# Altium PCB PCB1.PcbDoc
Units mm, origin at the board's own origin, x right, y up, seen from the top; angles counter-clockwise.
Board outline 99.95 x 60.07 mm, 2 copper layers (Top Layer, Bottom Layer); 15 components, 7 nets, 40 pads, 0 vias.
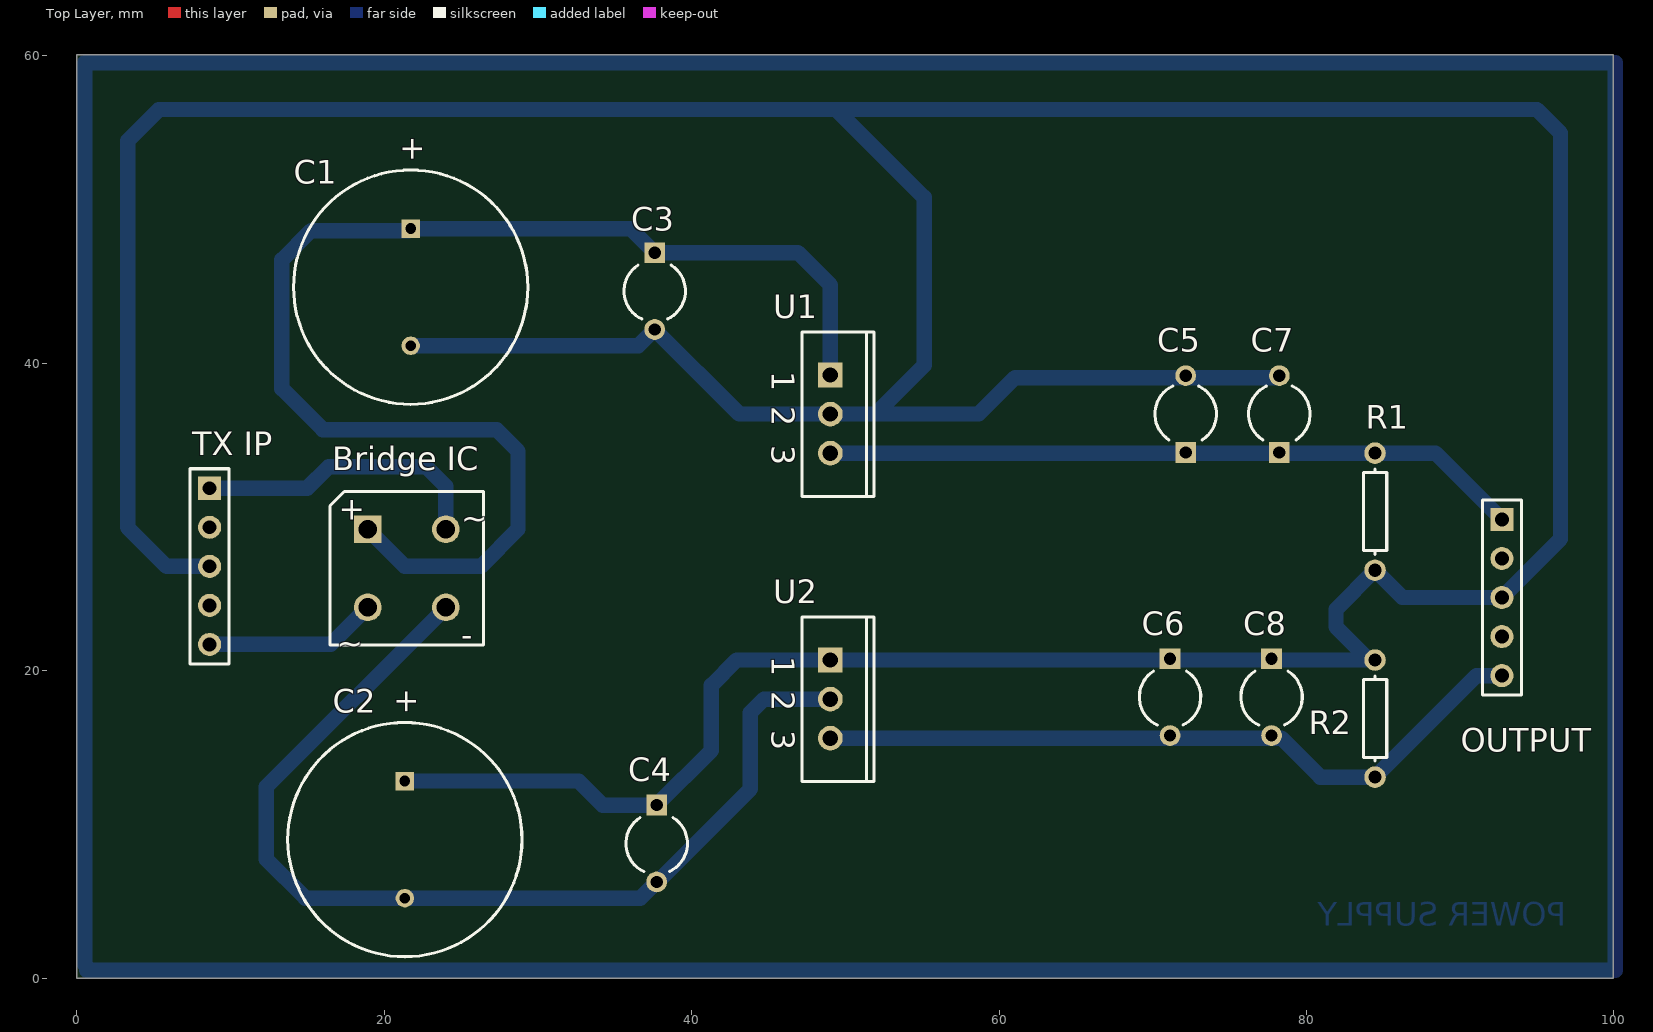
[diagram p0: Top Layer view]
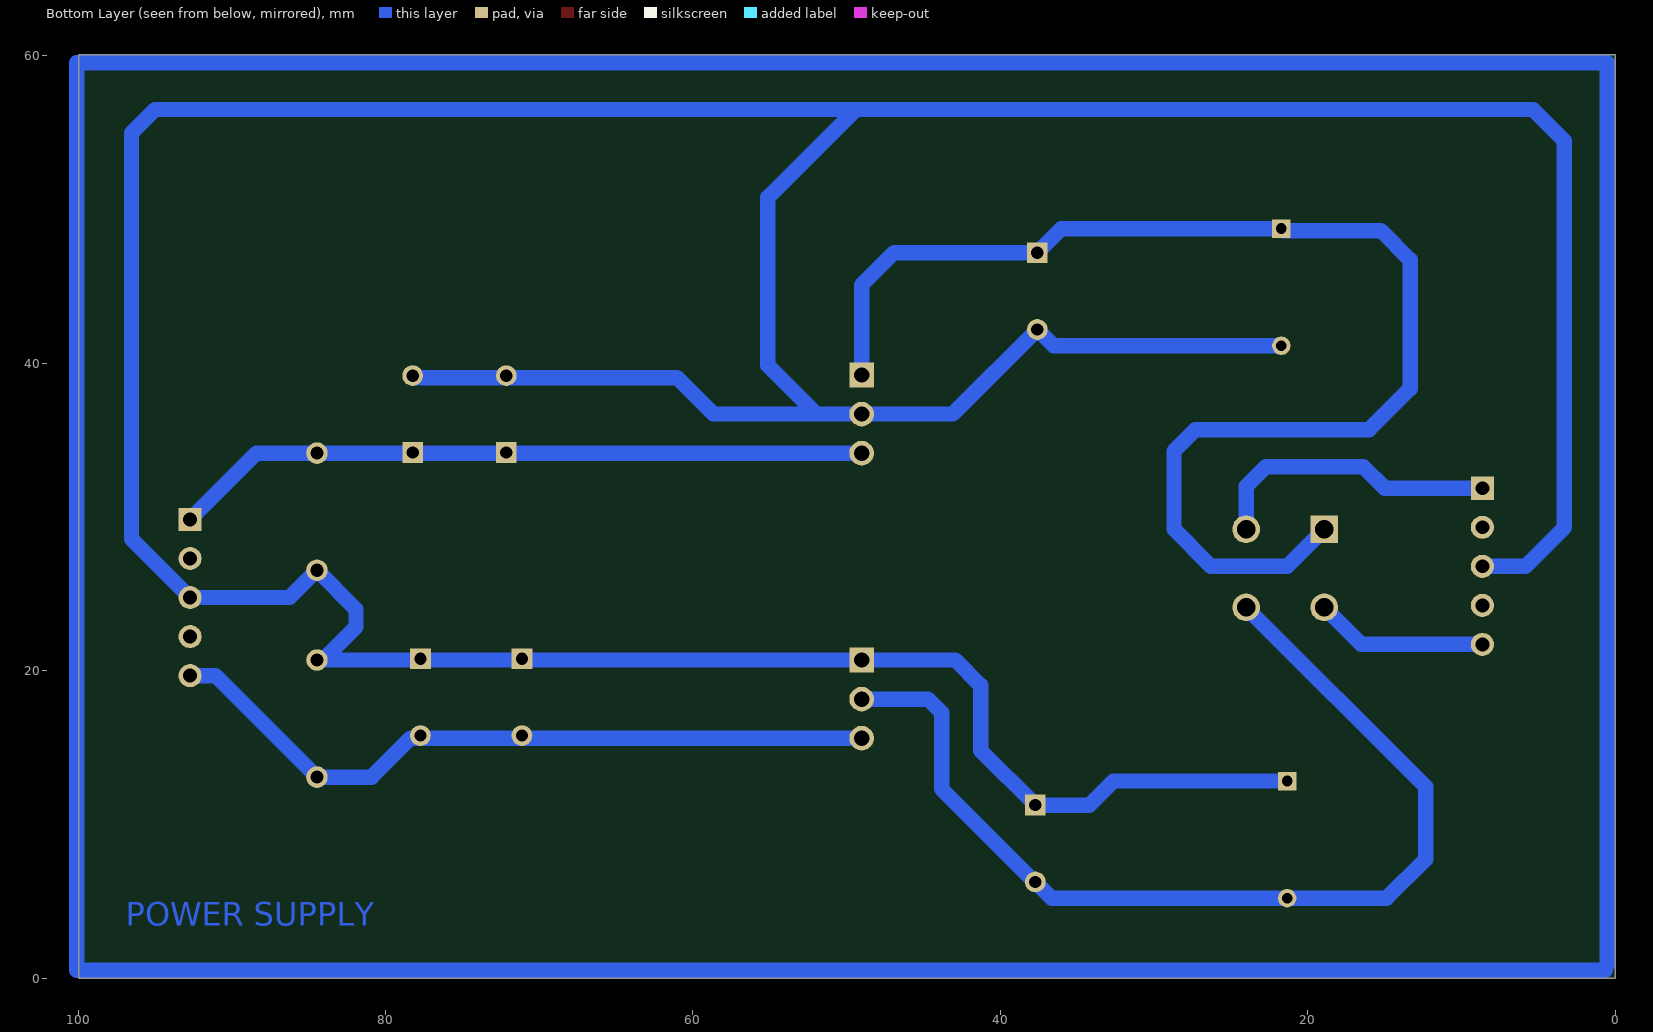
[diagram p1: Bottom Layer view, seen from below]

## Layer stack, top to bottom
Top Layer: signal copper 0.0356
Dielectric: dielectric 0.32, FR-4, Dk 4.8
Bottom Layer: signal copper 0.0356

## Board outline
0,0 0,60.071 99.949,60.071 99.949,0 0,0

## Design rules (kind name [scope] priority, off if disabled: settings)
Clearance [All] p1: gap=0.254
PolygonConnect [All] p1: connectstyle=Relief reliefconductorwidth=0.254 reliefentries=4 polygonreliefangle="90 Angle"
RoutingLayers [All] p1: top layer_v5=FALSE bottom layer_v5=TRUE
RoutingVias [All] p1: holewidth=0.711 width=1.27 viastyle="Through Hole" minholewidth=0.711 minwidth=1.27 maxholewidth=0.711 maxwidth=1.27
SilkscreenOverComponentPads [All] p1: minsilkscreentomaskgap=0.254
SolderMaskExpansion [All] p1: expansion=0.102
Width [All] p1: maxlimit=1 minlimit=1 preferedwidth=1
26 further rules are at their usual default settings.

## Components (designator, comment, footprint, x,y, rotation, side; value= is the part's Value field where it differs from the comment)
"Bridge IC" "Bridge1" D-38 21.463,26.67 r0 top
C1 "Cap Pol1" RB7.6-15 21.717,44.958 r90 top
C2 "Cap Pol1" RB7.6-15 21.336,9.017 r90 top
C3 "Cap2" CAPR5-4X5 37.592,44.704 r270 top
C4 "Cap2" CAPR5-4X5 37.719,8.763 r270 top
C5 "Cap2" CAPR5-4X5 72.136,36.703 r90 top
C6 "Cap2" CAPR5-4X5 71.12,18.288 r270 top
C7 "Cap4" CAPR5-4X5 78.232,36.703 r90 top
C8 "Cap4" CAPR5-4X5 77.724,18.288 r270 top
OUTPUT "Header 5" HDR1X5 92.71,29.845 r270 top
R1 "res" AXIAL-0.3 84.455,30.353 r90 top
R2 "res" AXIAL-0.3 84.455,16.891 r270 top
"TX IP" "Header 5" HDR1X5 8.636,31.877 r270 top
U1 "LM317KC" KC03 49.022,36.703 r270 top
U2 "LM317KC" KC03 49.022,18.161 r270 top

## Footprints (in the part's own frame and the unit in brackets; to place one, negate y for a bottom-side part, rotate by r counter-clockwise, add the part's x,y. Pads: shape width x height; smd on the part's side, far side on the other; paste and mask are expansions set on the pad)
AXIAL-0.3 [mm] "Axial Device, Thru-Hole; 2 Leads; 0.3 in Pin Spacing"
  round 1.4 hole 0.85: 1(-3.81,0) 2(3.81,0)
  silkscreen extent -2.77,-0.76 2.77,0.76
CAPR5-4X5 [mm] "Capacitor; 2 Leads"
  rect 1.35x1.35 hole 0.8: 1(-2.5,0)
  round 1.35 hole 0.8: 2(2.5,0)
  silkscreen extent -1.69,-2 1.82,2
D-38 [mm] "Bridge Rectifier; 4 Terminals; Body 9.4 x 9.4 mm (typ); Pitch 5.08 mm"
  rect 1.8x1.8 hole 1.2: 1(-2.54,2.54)
  round 1.8 hole 1.2: 2(-2.54,-2.54) 3(2.54,-2.54) 4(2.54,2.54)
  silkscreen extent -5,-5 5,5, body extent -5,-5 5,5, height 9.91
HDR1X5 [mm] "Connector; Header; 5 Position"
  rect 1.5x1.5 hole 0.9: 1(0,0)
  round 1.5 hole 0.9: 2(2.54,0) 3(5.08,0) 4(7.62,0) 5(10.16,0)
  silkscreen extent -1.27,-1.27 11.43,1.27
KC03 [mm] "TO, Thru-Hole, Vertical, Heatsink Mounted; 3 In-Line Leads; Pitch 2.54 mm"
  rect 1.6x1.6 hole 1: 1(-2.54,0)
  round 1.6 hole 1: 2(0,0) 3(2.54,0)
  silkscreen extent -5.35,-1.85 5.35,2.85
RB7.6-15 [mm] "Polarized Capacitor (Radial); 2 Leads"
  rect 1.2x1.2 hole 0.7: 1(3.81,0)
  round 1.2 hole 0.7: 2(-3.81,0)
  silkscreen extent -7.62,-7.62 7.62,7.62

## Part data
"Bridge IC": "Full Wave Diode Bridge"
C1 C2: "Polarized Capacitor (Radial)"
C3 C4 C5 C6: "Capacitor"
C7 C8: library part Cap2, "Capacitor"
OUTPUT "TX IP": "Header, 5-Pin"
R1 R2: library part Res1, "Resistor"
U1 U2: "3-Terminal Adjustable Regulator"

## Nets (pads, with @x,y where several pads share a name; then routed paths per layer and width w, separated by ;. In a path a pad name is that pad's centre, name@x,y a point inside that pad or via, vN(x,y) a via of type N, cw(c..) or ccw(c..) an arc to the next point about the centre after c; other vN are vias at no path point)
GND: "TX IP.3" C1.2 C2.1 C3.2 C4.1 C5.2 C6.1 C7.2 C8.1 OUTPUT.3 R1.1 R2.1 U1.2 U2.1 | length 328.7
  Bottom Layer w1: 8.636,26.797 5.842,26.797 3.302,29.337 3.302,54.483 5.334,56.515 49.403,56.515 ; C2.1 32.639,12.827 34.203,11.263 C4.1 41.275,14.819 41.275,19.05 42.926,20.701 U2.1 R2.1@84.074,20.701 ; C1.2 36.536,41.148 C3.2 43.093,36.703 U1.2 51.943,36.703 ; C7.2 78.105,39.076 61.047,39.076 58.674,36.703 51.943,36.703 ; R2.1 R2.1@84.074,20.701 ; 49.403,56.515 55.118,50.8 55.118,39.878 51.943,36.703 ; 49.403,56.515 94.996,56.515 96.52,54.991 96.52,28.575 OUTPUT.3 86.233,24.765 R1.1 81.915,24.003 81.915,22.86 R2.1@84.074,20.701
"NetBridge IC_1": "Bridge IC.1" C1.1 C3.1 U1.1 | length 86.2
  Bottom Layer w1: 18.923,29.21 21.336,26.797 26.289,26.797 28.702,29.21 28.702,34.29 27.305,35.687 16.002,35.687 13.335,38.354 13.335,46.736 15.24,48.641 21.59,48.641 C1.1 36.028,48.768 C3.1 46.903,47.204 49.022,45.085 U1.1
"NetBridge IC_2": "Bridge IC.2" "TX IP.5" | length 11.3
  Bottom Layer w1: 8.636,21.717 16.51,21.717 18.923,24.13
"NetBridge IC_3": "Bridge IC.3" C2.2 C4.2 U2.2 | length 67.2
  Bottom Layer w1: 24.003,24.13 12.319,12.446 12.319,7.747 14.859,5.207 C2.2 36.663,5.207 C4.2 37.759,6.263 43.815,12.319 43.815,17.272 44.704,18.161 U2.2
"NetBridge IC_4": "Bridge IC.4" "TX IP.1" | length 19.3
  Bottom Layer w1: 8.636,31.877 14.986,31.877 16.383,33.274 22.733,33.274 24.003,32.004 24.003,29.21
NetC5_1: C5.1 C7.1 OUTPUT.1 R1.2 U1.3 | length 45.5
  Bottom Layer w1: U1.3 R1.2 88.392,34.163 OUTPUT.1
NetC6_2: C6.2 C8.2 OUTPUT.5 R2.2 U2.3 | length 47.5
  Bottom Layer w1: U2.3 78.359,15.621 80.899,13.081 R2.2 91.059,19.685 OUTPUT.5
pads on no net: "TX IP.2" "TX IP.4" OUTPUT.2 OUTPUT.4
copper on no net: | length 317.1
  Bottom Layer w1: 0.635,0.508 100.076,0.508 100.076,59.563 0.508,59.563 0.508,0.889 0.762,0.635

## Other copper
Bottom Layer:
  text "POWER SUPPLY" at 96.901,3.429 h1.52

## Text inside footprints (layer, text, board x,y; h text height)
"Bridge IC": Top Overlay "~" at 25.019,29.21 h1.5; Top Overlay "~" at 16.891,21.082 h1.5; Top Overlay "-" at 25.019,21.59 h1.5; Top Overlay "+" at 17.053,29.834 h1.5
C1: Top Overlay "+" at 22.454,53.09 h1.5 r90
C2: Top Overlay "+" at 22.073,17.149 h1.5 r90
U1: Top Overlay "3" at 45.197,34.663 h1.5 r270; Top Overlay "1" at 45.197,39.493 h1.5 r270; Top Overlay "2" at 45.197,37.203 h1.5 r270
U2: Top Overlay "3" at 45.197,16.121 h1.5 r270; Top Overlay "1" at 45.197,20.951 h1.5 r270; Top Overlay "2" at 45.197,18.661 h1.5 r270